# Altium PCB RT_SUPER_EXT2.PCBdoc
Units mil, origin at the board's own origin, x right, y up, seen from the top; angles counter-clockwise.
Board outline 650 x 2535.01 mil, 2 copper layers (Top Layer, Bottom Layer), stack 6.8 mil thick; 2 components, 12 nets, 36 pads, 36 vias.
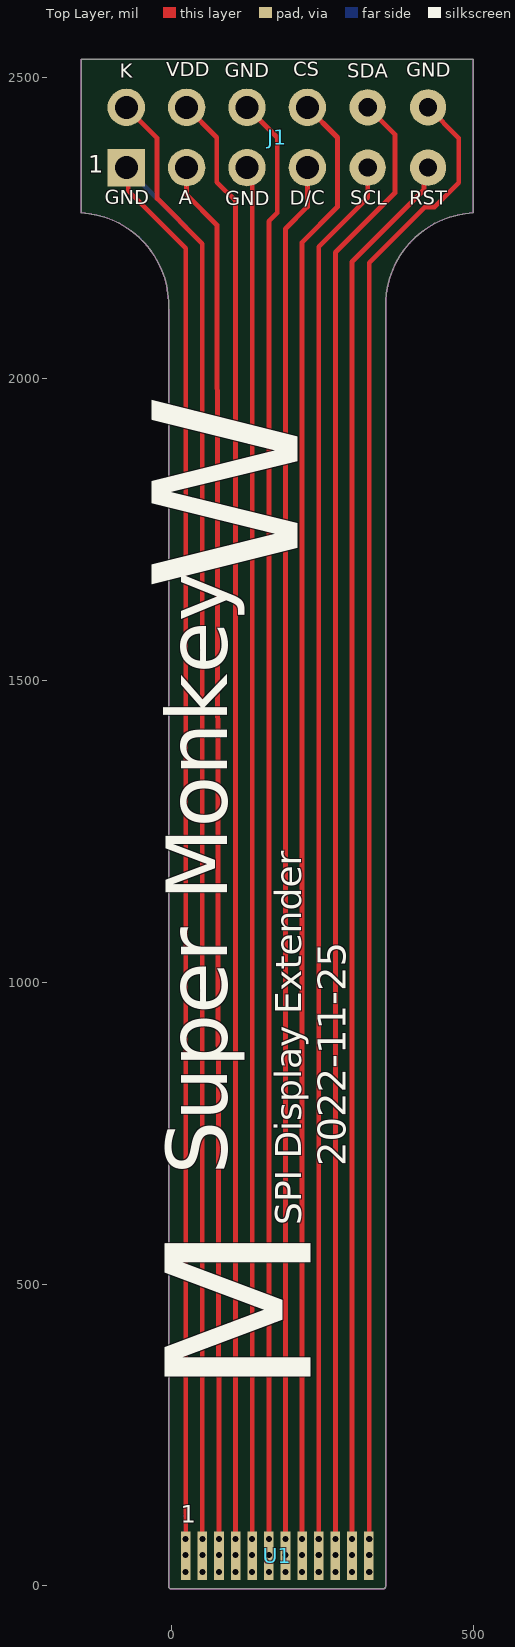
[diagram p0: Top Layer view]
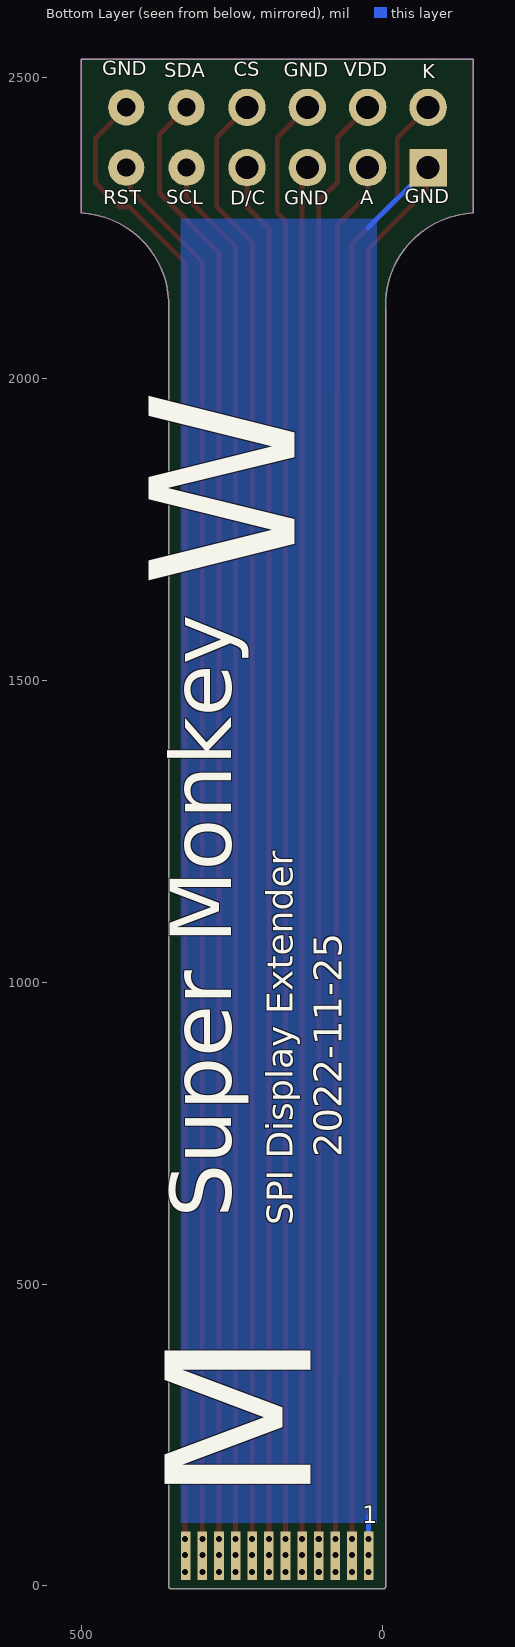
[diagram p1: Bottom Layer view, seen from below]

## Layer stack, top to bottom
Top Solder: solder mask 1, Solder Resist, Dk 3.5
Top Layer: signal copper 1.4
Dielectric1: core 4, Core-025, Dk 4.6
Bottom Layer: signal copper 1.4
Bottom Solder: solder mask 1, Solder Resist, Dk 3.5

## Board outline
-5.01,0 -5.02,2115 -5,2115 ccw(c-157.5,2122.5) -150,2275 -150,2530 500,2530 500,2275 ccw(c507.5,2122.5) 355,2115 355.01,0 cw(c350,0) 350,-5.01 0,-5.01 cw(c0,0)

## Design rules (kind name [scope] priority, off if disabled: settings)
Clearance [All] p1: gap=5 ignorepadtopadclearanceinfootprint=FALSE except(8: Arc-Poly Track-Poly SMDPad-Poly THPad-Poly Via-Poly Fill-Poly Poly-Poly)
ComponentClearance ComponentClearance_1 [HasFootprint('ER-TFT1.54-1')] p1: gap=0 collisioncheckmode=3 verticalgap=0 showdistances=FALSE
ComponentClearance [All] p2: gap=10 collisioncheckmode=3 verticalgap=10 showdistances=FALSE
DiffPairsRouting [All] p1: maxlimit=10 minlimit=10 mostfreqgap=10 substack1={33EDACA6-669A-4D7A-B0AE-E8B1CE52F815} toplayer_{33edaca6-669a-4d7a-b0ae-e8b1ce52f815}_minwidth=15 toplayer_{33edaca6-669a-4d7a-b0ae-e8b1ce52f815}_maxwidth=15 toplayer_{33edaca6-669a-4d7a-b0ae-e8b1ce52f815}_prefwidth=15 bottomlayer_{33edaca6-669a-4d7a-b0ae-e8b1ce52f815}_minwidth=15 bottomlayer_{33edaca6-669a-4d7a-b0ae-e8b1ce52f815}_maxwidth=15 bottomlayer_{33edaca6-669a-4d7a-b0ae-e8b1ce52f815}_prefwidth=15 toplayer_minwidth=15 toplayer_maxwidth=15 toplayer_prefwidth=15 bottomlayer_minwidth=15 bottomlayer_maxwidth=15 bottomlayer_prefwidth=15 maxuncoupledlength=500
PlaneClearance [All] p1: clearance=10
PolygonConnect PolygonConnect_2 [InNet('GND')] p1: thpad.connectstyle=Direct thpad.reliefconductorwidth=10 thpad.reliefentries=4 thpad.polygonreliefangle="90 Angle" thpad.airgapwidth=10 smdpad.connectstyle=Relief smdpad.reliefconductorwidth=10 smdpad.reliefentries=4 smdpad.polygonreliefangle="90 Angle" smdpad.airgapwidth=10 via.connectstyle=Direct via.reliefconductorwidth=10 via.reliefentries=4 via.polygonreliefangle="90 Angle" via.airgapwidth=10
PolygonConnect PolygonConnect_1 [IsVia] p2: connectstyle=Direct reliefconductorwidth=10 reliefentries=4 polygonreliefangle="90 Angle" airgapwidth=10
PolygonConnect [All] p3: connectstyle=Relief reliefconductorwidth=10 reliefentries=4 polygonreliefangle="90 Angle" airgapwidth=5
RoutingVias [All] p1: holewidth=12 width=26 viastyle="Through Hole" minholewidth=6 minwidth=6 maxholewidth=50 maxwidth=75
SilkToSolderMaskClearance SilkscreenOverComponentPads [IsPad] p1: minsilkscreentomaskgap=10 clearancetoexposedcopper=TRUE
SolderMaskExpansion [All] p1: expansion=4 istentingtop=FALSE
Width [All] p1: maxlimit=200 minlimit=5 preferedwidth=5 substack1={33EDACA6-669A-4D7A-B0AE-E8B1CE52F815}
26 further rules are at their usual default settings.

## Classes and differential pairs
component class RT_SUPER_EXT2: U1

## Components (designator, comment, footprint, x,y, rotation, side; value= is the part's Value field where it differs from the comment)
J1 "Generic Header 2x6 0.100\"" "HEADER 2x6 .100\"" -75,2350 r0 top
U1 "ER-TFT1.54__EXT" "ER-TFT1.54-1 - EXT" 175,50 r180 top

## Footprints (in the part's own frame and the unit in brackets; to place one, negate y for a bottom-side part, rotate by r counter-clockwise, add the part's x,y. Pads: shape width x height; smd on the part's side, far side on the other; paste and mask are expansions set on the pad)
"ER-TFT1.54-1 - EXT" [mil]
  rect 16x80 smd far side mask+0: 1(151.57,0) 2(124.02,0) 3(96.46,0) 4(68.9,0) 5(41.34,0) 6(13.78,0) 7(-13.78,0) 8(-41.34,0) 9(-68.9,0) 10(-96.46,0) 11(-124.02,0) 12(-151.57,0)
  rect 16x80 smd mask+0: 1(151.57,0) 2(124.02,0) 3(96.46,0) 4(68.9,0) 5(41.34,0) 6(13.78,0) 7(-13.78,0) 8(-41.34,0) 9(-68.9,0) 10(-96.46,0) 11(-124.02,0) 12(-151.57,0)
"HEADER 2x6 .100\"" [mil]
  rect 62x62 hole 38: 1(0,0)
  round 62 hole 38: 2(0,100) 3(100,0) 4(100,100) 5(200,0) 6(200,100) 7(300,0) 8(300,100)
  round 60 hole 30: 9(400,0) 10(400,100) 11(500,0) 12(500,100)

## Part data
J1: library part HEADER_12, ComponentLink6Description=https://datasheet.ciiva.com/23923/1747739-23923127.pdf, ComponentLink6URL=https://datasheet.ciiva.com/23923/1747739-23923127.pdf, ComponentLink7Description=https://datasheet.ciiva.com/10083/0901200130-pcb-headers-10083978.pdf, ComponentLink7URL=https://datasheet.ciiva.com/10083/0901200130-pcb-headers-10083978.pdf, ComponentLink8Description=https://datasheet.ciiva.com/26307/cgrid-iii-eng-tds-26307658.pdf, ComponentLink8URL=https://datasheet.ciiva.com/26307/cgrid-iii-eng-tds-26307658.pdf, ComponentLink9Description=https://datasheet.ciiva.com/5151/0901200130-pcb-headers-230424-5151183.pdf, ComponentLink9URL=https://datasheet.ciiva.com/5151/0901200130-pcb-headers-230424-5151183.pdf
U1: "EXTENTION FOOTPRINT", Manufacturer="Buy Display", Manufacturer Part Number=ER-TFT1.54-1

## Via types
v1: diameter 10, hole 10, Top Layer to Bottom Layer, tented both sides, 36 vias

## Nets (pads, with @x,y where several pads share a name; then routed paths per layer and width w, separated by ;. In a path a pad name is that pad's centre, name@x,y a point inside that pad or via, vN(x,y) a via of type N, cw(c..) or ccw(c..) an arc to the next point about the centre after c; other vN are vias at no path point)
NetJ1_1: J1.1 U1.1 | length 2521.1
  Top Layer w8: J1.1 -71.69,2346.69 -71.69,2311.69 23.43,2216.57 v1(23.43,77.56) U1.1@23.43,50
  Bottom Layer w8: J1.1 25,2250 ; 23,116 23.43,116 v1(23.43,77.56)
  other v1: 23.43,23.43 23.43,50.98
NetJ1_2: J1.2 U1.2 | length 2451.2
  Top Layer w8: J1.2 -24,2399 -24,2299 50.98,2224.02 v1(50.98,77.56) v1(50.98,50.98)
  other v1: 50.98,23.43
NetJ1_3: J1.3 U1.3 | length 2319.7
  Top Layer w8: J1.3 25,2305 75.04,2254.96 v1(78.54,77.56) v1(78.54,50.98)
  other v1: 78.54,23.43
NetJ1_4: J1.4 U1.4 | length 2432.6
  Top Layer w8: J1.4 75,2400 75,2326 106.1,2294.9 106.1,2280 v1(106.1,77.56) v1(106.1,50.98)
  other v1: 106.1,23.43
NetJ1_5: J1.5 U1.5 | length 2302.6
  Top Layer w8: J1.5 133.66,2341.34 133.66,2280 v1(133.66,77.56) v1(133.66,50.98)
  other v1: 133.66,23.43
NetJ1_6: J1.6 U1.6 | length 2425.4
  Top Layer w8: J1.6 175,2400 175,2275 161.22,2261.22 v1(161.22,77.56) v1(161.22,50.98)
  other v1: 161.22,23.43
NetJ1_7: J1.7 U1.7 | length 2314
  Top Layer w8: v1(188.78,50.98) v1(188.78,77.56) 188.78,2248.78 225,2285 J1.7
  other v1: 188.78,23.43
NetJ1_8: J1.8 U1.8 | length 2444
  Top Layer w8: v1(216.34,50.98) v1(216.34,77.56) 216.34,2226.34 275,2285 275,2400 J1.8
  other v1: 216.34,23.43
NetJ1_9: J1.9 U1.9 | length 2332.6
  Top Layer w8: v1(243.9,50.98) v1(243.9,77.56) 243.9,2218.9 325,2300 J1.9
  other v1: 243.9,23.43
NetJ1_10: J1.10 U1.10 | length 2458.5
  Top Layer w8: v1(271.46,50.98) v1(271.46,77.56) 271.46,2209.46 370,2308 370,2405 J1.10
  other v1: 271.46,23.43
NetJ1_11: J1.11 U1.11 | length 2351.2
  Top Layer w8: v1(299.02,50.98) v1(299.02,77.56) 299.02,2194.02 418.3,2313.3 418.3,2343.3 J1.11
  other v1: 299.02,23.43
NetJ1_12: J1.12 U1.12 | length 2491.4
  Top Layer w8: U1.12@326.57,77.56 326.57,51.97 v1(327.56,50.98) ; v1(327.56,77.56) 327.56,2192.56 420,2285 436,2285 476,2325 476,2399 J1.12
  other v1: 327.56,23.43

## Polygon pours and split planes (outlines as drawn)
NetJ1_1 on Bottom Layer "NETJ1_1_L02_P000" (solid, remove dead copper, pour order 0): 10,105 10,2265 335,2265 335,105

## Keep-outs
Keep-Out Layer:
  the board outline again, w1

## Silkscreen, mask and mechanical layers (free items; w line width, h text height)
Top Overlay:
  text "CS" at 202,2493.47 h40
  text "VDD" at -9,2493 h40
  text "GND" at 389,2492.47 h40
  text "GND" at 88,2491.47 h40
  text "K" at -86,2491 h40
  text "SDA" at 291,2490.47 h40
  text "GND" at -111,2281.47 h40
  text "A" at 12,2281 h40
  text "SCL" at 296,2280.47 h40
  text "RST" at 394,2280.47 h40
  text "GND" at 89,2279.47 h40
  text "D/C" at 196,2280.44 h40
  text "W" at 304,1648 h500 r90
  text "2022-11-25" at 304,695 h80 r90
  text "Super Monkey" at 126,681 h175 r90
  text "M" at 350,600 h625 r90
  text "SPI Display Extender" at 230,597.5 h75 r90
Bottom Overlay:
  text "GND" at 465,2494.47 h40
  text "CS" at 247,2493.47 h40
  text "VDD" at 65,2493 h40
  text "GND" at 164,2492.47 h40
  text "SDA" at 362,2491.47 h40
  text "K" at -65,2490 h40
  text "GND" at -36,2282.47 h40
  text "SCL" at 359,2281.47 h40
  text "RST" at 463,2281.47 h40
  text "A" at 37,2281 h40
  text "GND" at 163,2280.47 h40
  text "D/C" at 253,2280.44 h40
  text "W" at 51,1655 h500 r270
  text "2022-11-25" at 52,710 h80 r270
  text "Super Monkey" at 217,610 h175 r270
  text "SPI Display Extender" at 134,597.5 h75 r270
  text "M" at 0,136 h625 r270
  text "1" at 34,94 h50
[8] Board Outline:
  lines w5: -150,2275 cw(c-157.5,2122.5) -5,2115 -5.01,0 ccw(c0,0) 0,-5.01 350,-5.01 ccw(c350,0) 355.01,0 355,2115 cw(c507.5,2122.5) 500,2275 500,2530 -150,2530 -150,2275

## Text inside footprints (layer, text, board x,y; h text height)
J1: Top Overlay "1" at -138,2332 h50
U1: Top Overlay "1" at 15,95 h50